# Altium PCB PCB1.PcbDoc
Units mil, origin at the board's own origin, x right, y up, seen from the top; angles counter-clockwise.
Board outline 3167.66 x 2735 mil, 2 copper layers (Top Layer, Bottom Layer); 57 components, 38 nets, 179 pads, 149 vias.
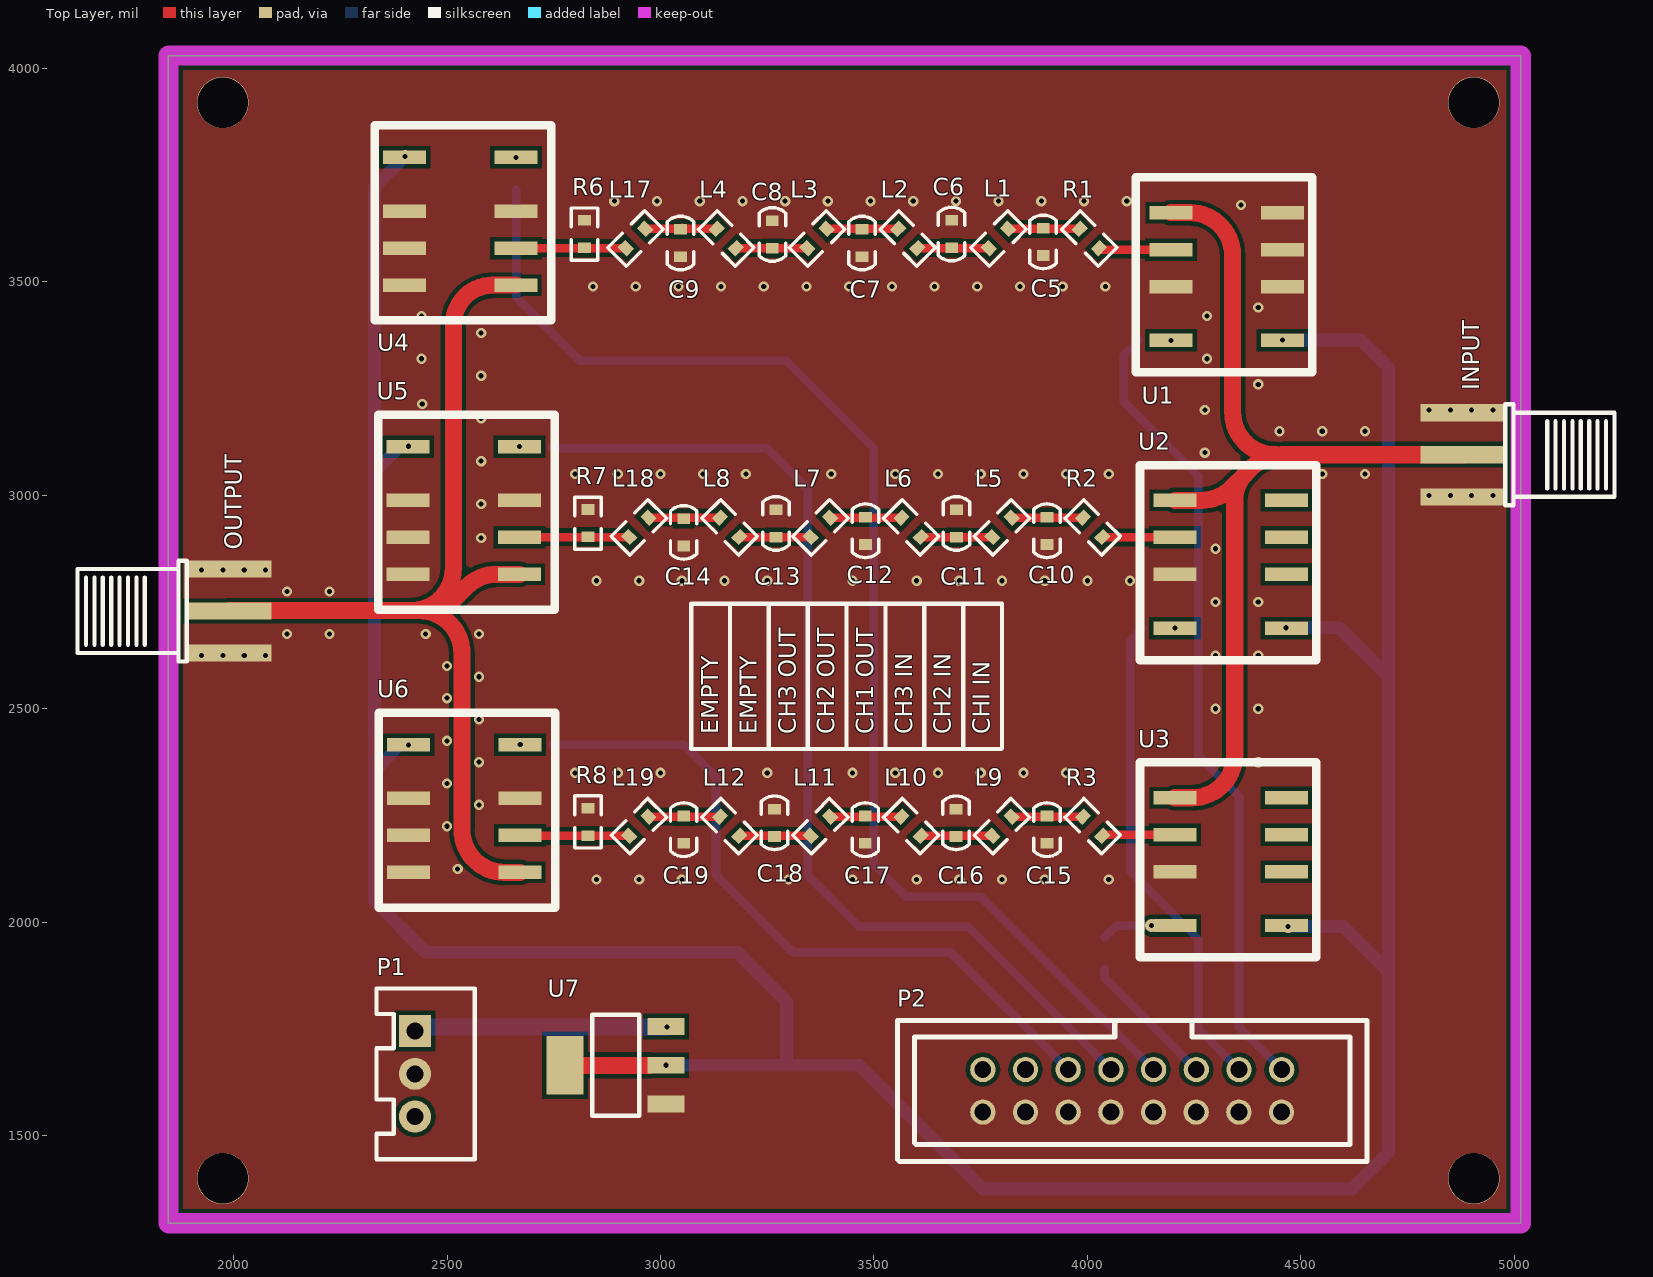
[diagram p0: Top Layer view]
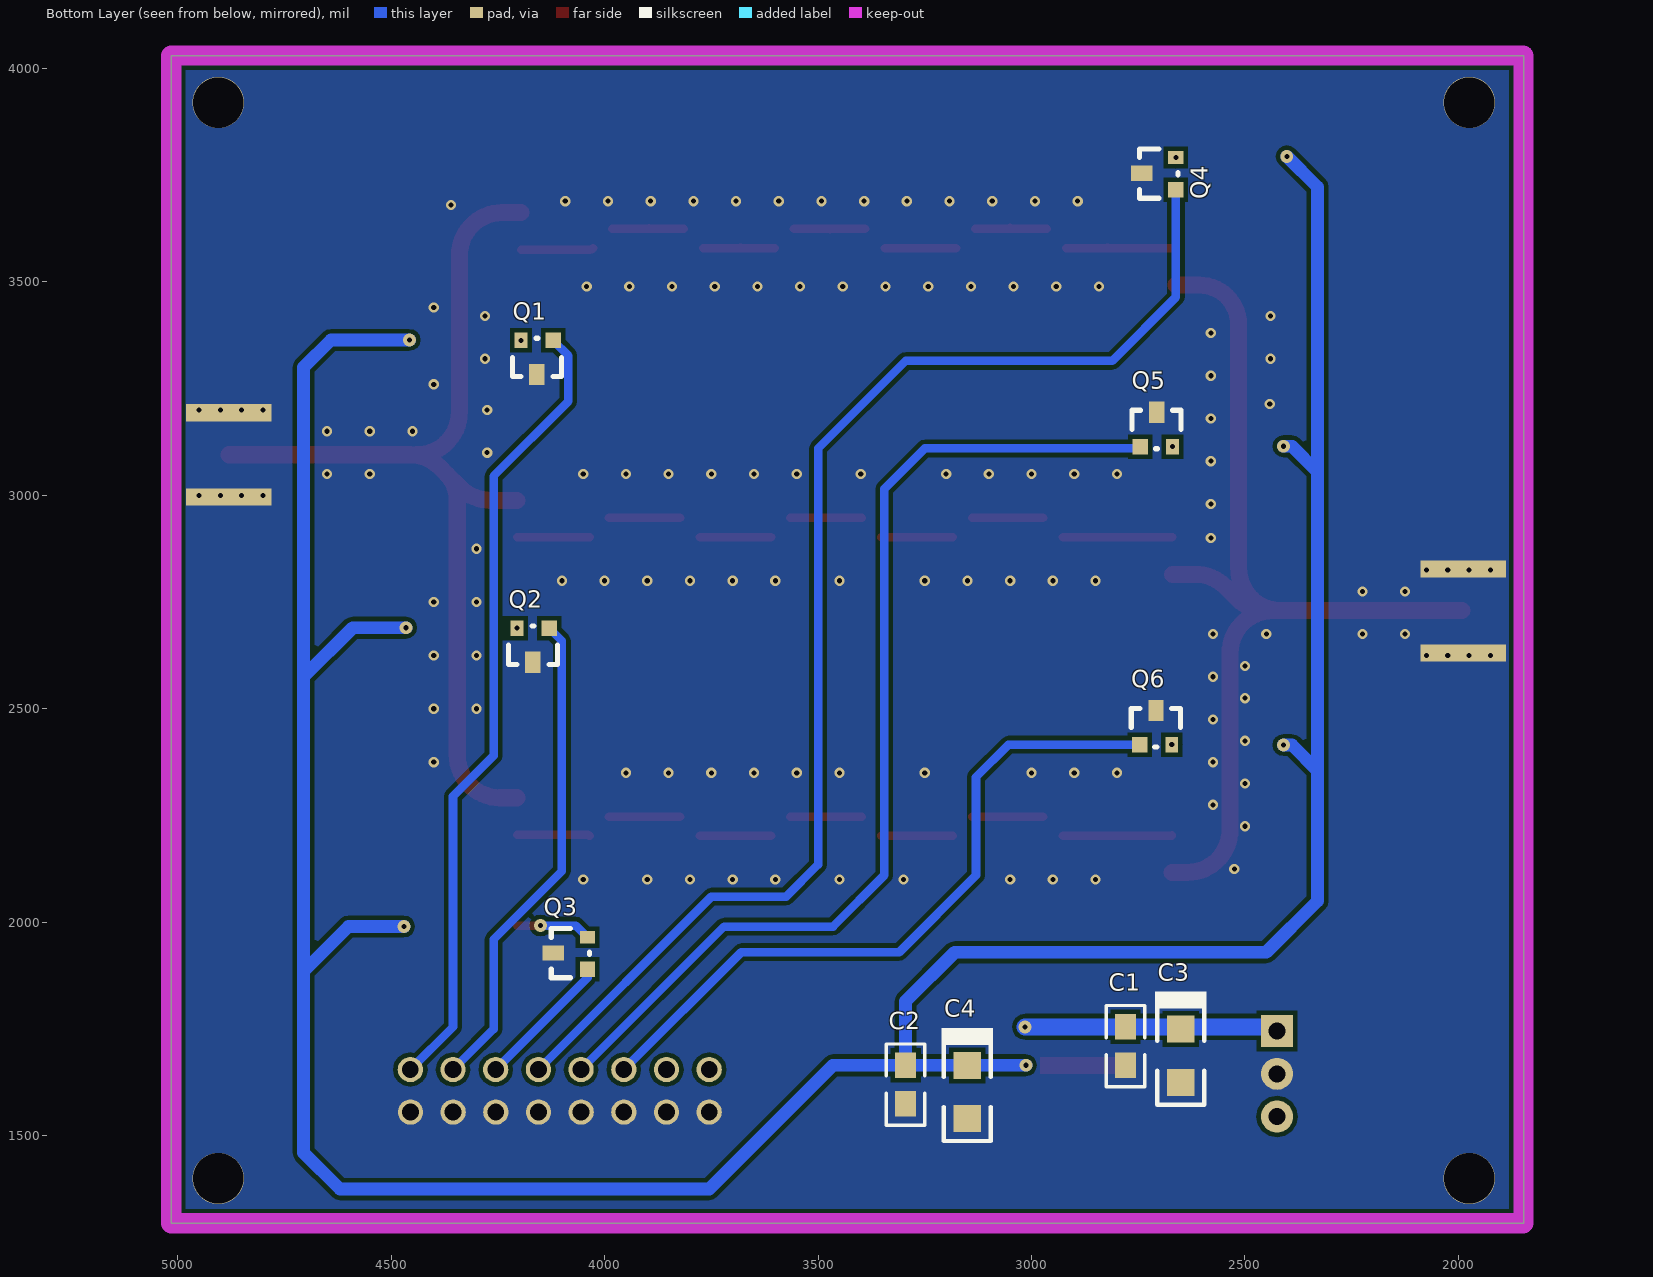
[diagram p1: Bottom Layer view, seen from below]

## Layer stack, top to bottom
Top Solder: solder mask 0.4, Solder Resist, Dk 3.5
Top Layer: signal copper 1.4
Dielectric 1: dielectric 12.6, FR-4, Dk 4.8
Bottom Layer: signal copper 1.4
Bottom Solder: solder mask 0.4, Solder Resist, Dk 3.5

## Board outline
1847.34,1295 1847.34,4030 5015,4030 5015,1295

## Design rules (kind name [scope] priority, off if disabled: settings)
Clearance [All] p1: gap=10
PlaneConnect [All] p1: planeconnectstyle=Direct reliefexpansion=20 reliefentries=4 reliefconductorwidth=10 reliefairgap=10
PolygonConnect [All] p1: connectstyle=Direct reliefconductorwidth=10 reliefentries=4 polygonreliefangle="90 Angle" airgapwidth=10
RoutingVias [All] p1: holewidth=28 width=50 viastyle="Through Hole" minholewidth=28 minwidth=50 maxholewidth=28 maxwidth=50
SolderMaskExpansion [All] p1: expansion=4
Width [All] p1: maxlimit=100 minlimit=10 preferedwidth=10
29 further rules are at their usual default settings.

## Components (designator, comment, footprint, x,y, rotation, side; value= is the part's Value field where it differs from the comment)
C1 "0.1uf" 0805 2780,1665 r90 bottom
C2 "0.1uf" 0805 3295,1575 r90 bottom
C3 "Cap" 3216C-TYPE_A 2650.5,1750 r90 bottom
C4 "Cap" 3216C-TYPE_A 3150.5,1665 r90 bottom
C5 "0.1uf" 0603C 3896.37,3561.63 r90 top
C6 "0.1uf" 0603C 3682,3644 r270 top
C7 "0.1uf" 0603C 3472,3559 r90 top
C8 "0.1uf" 0603C 3262,3643 r270 top
C9 "0.1uf" 0603C 3047,3559 r90 top
C10 "0.1uf" 0603C 3905,2885 r90 top
C11 "0.1uf" 0603C 3693.12,2966.16 r270 top
C12 "0.1uf" 0603C 3480,2885 r90 top
C13 "0.1uf" 0603C 3270.62,2966.16 r270 top
C14 "0.1uf" 0603C 3054.37,2881.16 r90 top
C15 "0.1uf" 0603C 3905,2185 r90 top
C16 "0.1uf" 0603C 3692.34,2265 r270 top
C17 "0.1uf" 0603C 3479.69,2185 r90 top
C18 "0.1uf" 0603C 3267.03,2265 r270 top
C19 "0.1uf" 0603C 3054.37,2185 r90 top
INPUT "差分输出" SMA-LYING 4939.06,3098.94 r180 top (schematic designator Vo_S1)
L1 "0" 0603R 3791.77,3601.63 r225 top
L2 "0" 0603R 3579.17,3601.63 r135 top
L3 "0" 0603R 3366.57,3601.63 r225 top
L4 "0" 0603R 3153.97,3601.63 r135 top
L5 "0" 0603R 3799.77,2925 r225 top
L6 "0" 0603R 3587.17,2925 r135 top
L7 "0" 0603R 3374.57,2925 r225 top
L8 "0" 0603R 3161.97,2925 r135 top
L9 "0" 0603R 3799.77,2225 r225 top
L10 "0" 0603R 3587.17,2225 r135 top
L11 "0" 0603R 3374.57,2225 r225 top
L12 "0" 0603R 3161.97,2225 r135 top
L17 "0" 0603R 2941.37,3601.63 r225 top
L18 "0" 0603R 2949.37,2925 r225 top
L19 "0" 0603R 2949.37,2225 r225 top
OUTPUT "差分输出" SMA-LYING 1930,2725 r0 top (schematic designator Vo_S2)
P1 "XH2.54-3p" XH2.54-3p 2425,1745 r270 top
P2 "DC-316P" DC3-14P 4654.61,1770.35 r180 top
Q1 "SI2301" SOT-23 4072.83,3242.74 r0 bottom
Q2 "SI2301" SOT-23 4082.24,2568.74 r0 bottom
Q3 "SI2301" SOT-23 4160.28,1842.24 r90 bottom
Q4 "SI2301" SOT-23 2782.28,3668.24 r90 bottom
Q5 "SI2301" SOT-23 2792.76,3234.49 r180 bottom
Q6 "SI2301" SOT-23 2794.17,2536.26 r180 bottom
R1 "49.9R" 0603R 4004.37,3601.63 r135 top
R2 "49.9R" 0603R 4012.37,2925 r135 top
R3 "49.9R" 0603R 4012.37,2225 r135 top
R6 "49.9R" 0603R 2822,3612 r270 top
R7 "49.9R" 0603R 2830,2935 r270 top
R8 "49.9R" 0603R 2830,2235 r270 top
U1 "FTR-B3G" FTR-B3G 4507.39,3347.27 r90 top
U2 "FTR-B3G" FTR-B3G 4516.81,2673.27 r90 top
U3 "FTR-B3G" FTR-B3G 4516.81,1976.65 r90 top
U4 "FTR-B3G" FTR-B3G 2350.19,3807.35 r270 top
U5 "FTR-B3G" FTR-B3G 2358.19,3129.96 r270 top
U6 "FTR-B3G" FTR-B3G 2359.61,2431.73 r270 top
U7 "AMS1117-3.3V" SOT-223 2895,1665 r0 top

## Footprints (in the part's own frame and the unit in brackets; to place one, negate y for a bottom-side part, rotate by r counter-clockwise, add the part's x,y. Pads: shape width x height; smd on the part's side, far side on the other; paste and mask are expansions set on the pad)
0603C [mil]
  rect 25x30 smd: 1(0,0) 2(64,0)
  silkscreen extent -31,-31 95,31
0603R [mil]
  rect 25x30 smd: 1(-32,0) 2(32,0)
  silkscreen extent -61,-31 61,31
0805 [mil]
  rect 60x50 smd: 1(0,0) 2(90,0)
  silkscreen extent -50,-45 140,45
3216C-TYPE_A [mm]
  rect 1.6x1.65 smd: 1(0,0) 2(-3.175,0)
  silkscreen extent -4.51,-1.54 2.22,1.52
DC3-14P [mm]
  round 1.5 hole 1: 1(5.07,2.93) 2(5.08,5.461) 3(7.61,2.93) 4(7.618,5.461) 5(10.15,2.93) 6(10.157,5.461) 7(12.69,2.93) 8(12.695,5.461) 9(15.23,2.93) 10(15.233,5.461) 11(17.77,2.93) 12(17.772,5.461) 13(20.31,2.93) 14(20.31,5.461) 15(22.85,2.93) 16(22.85,5.461)
  silkscreen extent 0,0 27.92,8.4
FTR-B3G [mm]
  rect 0.8x2.56 smd: 1(0.4,1.28) 2(3.6,1.28) 3(5.8,1.28) 4(8,1.28) 5(8,7.92) 6(5.8,7.92) 7(3.6,7.92) 8(0.4,7.92)
  silkscreen extent -1.5,-0.5 10.1,10
SMA-LYING [mm]
  rect 5.08x1.016 smd: 0(1.5,0.1) 1(1.5,2.6) 1(1.5,-2.4)
  rect 5.08x1.016 smd far side: 1(1.5,2.6) 1(1.5,-2.4)
  silkscreen extent -7.5,-2.9 -1,3.1
SOT-23 [mil]
  rect 36x36 smd: 1(47.76,-120.28)
  rect 30x36 smd: 2(122.76,-120.28)
  rect 36x50 smd: 3(85.76,-40.28)
  silkscreen extent 28,-125 143,-35
SOT-223 [mm]
  rect 2.2x1 smd: 1(3,-2.3) 2(3,0) 3(3,2.3)
  rect 2.2x3.5 smd: 2(-3,0)
  silkscreen extent -1.4,-3 1.4,3, body extent -3.49,-3.24 3.49,3.24, height 1.64
XH2.54-3p [mil]
  rect 75x75 hole 40: 1(0,0)
  round 75 hole 40: 2(100,0) 3(200,0)
  silkscreen extent -100,-90 300,140

## Part data
C1 C2 C5 C6 C7 C8 C9 C10 C11 C12 C13 C14 C15 C16 C17 C18 C19: library part Cap
C3 C4: library part "Tantalium Cap"
INPUT OUTPUT: library part SMA
L1 L2 L3 L4 L5 L6 L7 L8 L9 L10 L11 L12 L17 L18 L19 R1 R2 R3 R6 R7 R8: library part Res
P2: library part DC3-16P

## Via types
v1: diameter 24, hole 12, Top Layer to Bottom Layer, 131 vias
v2: diameter 30, hole 12, Top Layer to Bottom Layer, 14 vias
v3: diameter 120.08, hole 118.11, Top Layer to Bottom Layer, 4 vias

## Nets (pads, with @x,y where several pads share a name; then routed paths per layer and width w, separated by ;. In a path a pad name is that pad's centre, name@x,y a point inside that pad or via, vN(x,y) a via of type N, cw(c..) or ccw(c..) an arc to the next point about the centre after c; other vN are vias at no path point)
5V: C2.2 C4.1 U1.1 U2.1 U3.1 U4.1 U5.1 U6.1 U7.2 | length 7723.7
  Bottom Layer w30: v2(2402,3794) 2330,3722 2330,3055 ; v2(2410,2415) 2390,2415 2330,2355 ; v2(2410,3115) 2390,3115 2330,3055 ; v2(3013.11,1665) C4.1 C2.2 ; v2(4457,3364) 4641,3364 4705,3300 4705,2575 ; v2(4465,2690) 4590,2690 4705,2575 ; v2(4470,1990) 4600,1990 4705,1885 ; 2330,2355 2330,3055 ; 2330,2355 2330,2050 2450,1930 3180,1930 3295,1815 C2.2 ; C2.2 3465,1665 3755,1375 4620,1375 4705,1460 4705,1885 ; 4705,1885 4705,2575
CH1: P2.1 Q1.1 | length 1876
  Bottom Layer w20: Q1.1 4085,3327.43 4085,3220 4260,3045 4260,2390 4355,2295 4355,1755 P2.1
CH2: P2.3 Q2.1 | length 1152.1
  Bottom Layer w20: Q2.1 4100,2659.02 4100,2120 4260,1960 4260,1750 P2.3
CH3: P2.5 Q3.1 | length 324.1
  Bottom Layer w20: Q3.1 4040,1870 P2.5
CH4: P2.7 Q4.1 | length 3065.5
  Bottom Layer w20: Q4.1 2662,3464 2811,3315 3295,3315 3500,3110 3500,2135 3575,2060 3750,2060 P2.7
CH5: P2.9 Q5.1 | length 2444.6
  Bottom Layer w20: Q5.1 2749.21,3110 3250,3110 3345,3015 3345,2110 3465,1990 3720,1990 P2.9
CH6: P2.11 Q6.1 | length 1658.5
  Bottom Layer w20: Q6.1 3054.02,2415.98 3130,2340 3130,2110 3310,1930 3680,1930 P2.11
GND: C1.1 C2.1 C3.2 C4.2 C5.1 C6.1 C7.1 C8.1 C9.1 C10.1 C11.1 C12.1 C13.1 C14.1 C15.1 C16.1 C17.1 C18.1 C19.1 INPUT.1 OUTPUT.1 P1.2 P2.2 P2.4 P2.6 P2.8 P2.10 P2.12 P2.14 P2.16 Q1.3 Q2.3 Q3.3 Q4.3 Q5.3 Q6.3 R6.1 R7.1 R8.1 U1.2 U1.3 U1.4 U1.7 U2.7 U3.7 U4.2 U4.3 U4.4 U4.7 U5.2 U5.3 U5.4 U5.7 U6.2 U6.3 U6.4 U6.7 U7.1
  other v1: 2850,2100 2950,2100 3050,2100 3300,2100 3450,2100 3600,2100 3700,2100 3800,2100 3900,2100 4050,2100 2525,2125 2500,2225 2575,2275 2500,2325 2800,2350 2900,2350 3000,2350 3250,2350 3450,2350 3550,2350 3650,2350 3750,2350 3850,2350 3950,2350 2575,2375 4400,2375 2500,2425 2575,2475 4300,2500 4400,2500 2500,2525 2575,2575 2500,2600 1925,2625 1975,2625 2025,2625 2075,2625 4300,2625 4400,2625 2125,2675 2225,2675 2450,2675 2575,2675 4300,2750 4400,2750 2125,2775 2225,2775 2850,2800 2950,2800 3050,2800 3150,2800 3250,2800 3450,2800 3600,2800 3700,2800 3800,2800 3900,2800 4000,2800 4100,2800 1925,2825 1975,2825 2025,2825 2075,2825 4300,2875 2580,2900 2580,2980 4800,3000 4850,3000 4900,3000 4950,3000 2800,3050 2900,3050 3000,3050 3100,3050 3200,3050 3400,3050 3550,3050 3650,3050 3750,3050 3850,3050 3950,3050 4050,3050 4550,3050 4650,3050 2580,3080 4275,3100 4450,3150 4550,3150 4650,3150 2580,3180 4275,3200 4800,3200 4850,3200 4900,3200 4950,3200 2442,3214 4400,3260 2580,3280 2440,3320 4280,3320 2580,3380 2440,3420 4280,3420 4400,3440 2842,3489 2942,3489 3042,3489 3142,3489 3242,3489 3342,3489 3442,3489 3542,3489 3642,3489 3742,3489 3842,3489 3942,3489 4042,3489 4360,3680 2892,3689 2992,3689 3092,3689 3192,3689 3292,3689 3392,3689 3492,3689 3592,3689 3692,3689 3792,3689 3892,3689 3992,3689 4092,3689
  other v3: 1975,1400 4905,1400 1975,3920 4905,3920
LPF1: R1.1 U1.6 | length 169.5
  Top Layer w20: R1.1 ccw(c4035.17,3587.17) 4035.17,3575.61 U1.6
LPF2: R2.1 U2.6 | length 170.2
  Top Layer w20: R2.1 ccw(c4036.83,2904.2) 4036.83,2901.61 U2.6
LPF3: R3.1 U3.6 | length 170.7
  Top Layer w20: R3.1 cw(c4041.34,2196.03) 4041.34,2205 U3.6
NetC1_2: C1.2 C3.1 P1.1 U7.3 | length 595.7
  Bottom Layer w30: P1.1 cw(c2435,1745) P1.1@2435,1755
  Bottom Layer w40: P1.1@2435,1755 C1.2 v2(3015,1755)
NetC5_2: C5.2 L1.1 R1.2 | length 168.1
  Top Layer w20: L1.1 3893.06,3624.25 ccw(c3893.06,3628.94) C5.2 ccw(c3899.69,3628.94) 3899.69,3624.25 R1.2
NetC6_2: C6.2 L1.2 L2.1 | length 167.9
  Top Layer w20: L2.1 3679.59,3579 ccw(c3679.59,3582.41) C6.2 ccw(c3684.41,3582.41) 3684.41,3579 L1.2
NetC7_2: C7.2 L2.2 L3.1 | length 168
  Top Layer w20: L3.1 3468.97,3624.25 cw(c3468.97,3619.97) C7.2 cw(c3475.03,3619.97) 3475.03,3624.25 L2.2
NetC8_2: C8.2 L3.2 L4.1 | length 167.3
  Top Layer w20: L4.1 C8.2 L3.2
NetC9_2: C9.2 L4.2 L17.1 | length 168.6
  Top Layer w20: L17.1 3045.64,3624.25 ccw(c3045.64,3632.36) 3051.37,3626.63 ccw(c3057.1,3632.36) 3057.1,3624.25 L4.2
NetC10_2: C10.2 L5.1 R2.2 | length 167.3
  Top Layer w20: L5.1 R2.2
NetC11_2: C11.2 L5.2 L6.1 | length 167.3
  Top Layer w20: L6.1 L5.2
NetC12_2: C12.2 L6.2 L7.1 | length 167.3
  Top Layer w20: L7.1 L6.2
NetC13_2: C13.2 L7.2 L8.1 | length 167.3
  Top Layer w20: L8.1 L7.2
NetC14_2: C14.2 L8.2 L18.1 | length 167.3
  Top Layer w20: L18.1 L8.2
NetC15_2: C15.2 L9.1 R3.2 | length 167.3
  Top Layer w20: L9.1 R3.2
NetC16_2: C16.2 L9.2 L10.1 | length 167.3
  Top Layer w20: L10.1 L9.2
NetC17_2: C17.2 L10.2 L11.1 | length 167.3
  Top Layer w20: L11.1 L10.2
NetC18_2: C18.2 L11.2 L12.1 | length 167.3
  Top Layer w20: L12.1 L11.2
NetC19_2: C19.2 L12.2 L19.1 | length 167.3
  Top Layer w20: L19.1 L12.2
OUT1: L17.2 R6.2 U4.6 | length 257.3
  Top Layer w20: U4.6 2819.59,3579 ccw(c2819.59,3582.41) R6.2 ccw(c2824.41,3582.41) 2824.41,3579 L17.2
OUT2: L18.2 R7.2 U5.6 | length 256.9
  Top Layer w20: U5.6 cw(c2671.83,2899.78) 2671.83,2902.37 L18.2
OUT3: L19.2 R8.2 U6.6 | length 255.6
  Top Layer w20: U6.6 ccw(c2673.86,2205.83) 2673.86,2202.37 L19.2
OUTPUT: OUTPUT.0 U4.5 U5.5 U6.5 | length 2378.6
  Top Layer w20: OUTPUT.0 cw(c1991.62,2726.37) OUTPUT.0@1991.62,2730
  Top Layer w40: OUTPUT.0@1991.62,2730 2415,2730 ccw(c2415,2830) 2515,2830 2515,3400.39 cw(c2607,3400.39) 2607,3492.39 U4.5 ; U5.5 2616.42,2815 ccw(c2616.42,2715) 2545.71,2785.71 2519.29,2759.29 cw(c2448.58,2830) 2448.58,2730 2435,2730 cw(c2435,2630) 2535,2630 2535,2216.77 ccw(c2635,2216.77) 2635,2116.77 U6.5
"SIGNAL IN": INPUT.0 U1.5 U2.5 U3.5 | length 2314.9
  Top Layer w20: 4369.96,3049.96 cw(c4430.36,2989.64) 4370,3050 ; 4440,3095 4456.42,3095
  Top Layer w40: U1.5 4240,3662.23 cw(c4240,3562.23) 4340,3562.23 4340,3195 ccw(c4440,3195) 4440,3095 ; U3.5 4245,2291.61 ccw(c4245,2391.61) 4345,2391.61 4345,2989.64 cw(c4430.36,2989.64) 4369.96,3049.96 4337.52,3017.52 cw(c4266.81,3088.23) 4266.81,2988.23 U2.5 ; 4370,3050 4385.71,3065.71 cw(c4456.42,2995) 4456.42,3095 INPUT.0
U1: Q1.2 U1.8
  other v2: 4195.58,3363.02
U2: Q2.2 U2.8
  other v2: 4205,2689.02
U3: Q3.2 U3.8 | length 176.4
  Top Layer w20: v2(4150,1992.4) U3.8
  Bottom Layer w20: Q3.2 4067.4,1992.4 v2(4150,1992.4)
U4: Q4.2 U4.8
  other v2: 2662,3791
U5: Q5.2 U5.8
  other v2: 2670,3114.21
U6: Q6.2 U6.8
  other v2: 2671.42,2415.98
pads on no net: P1.3 P2.13 P2.15 U2.2 U2.3 U2.4 U3.2 U3.3 U3.4

## Polygon pours and split planes (outlines as drawn)
GND on Bottom Layer "Top Layer-No Net" (solid, pour order 8): 1847.34,1295 5015,1295 5015,4030 1847.34,4030
GND on Top Layer "Top Layer-No Net" (solid, pour order 10): 1847.34,4020 1847.34,1295 5015,1295 5015,4020

## Keep-outs
Keep-Out Layer:
  the board outline again, w47.24

## Other copper
Top Layer:
  rectangle net 5V: 2785,1645 2980,1685

## Silkscreen, mask and mechanical layers (free items; w line width, h text height)
Top Overlay:
  lines w10: 3071.86,2406 3071.86,2746 ; 3075.86,2746 3799.86,2746 3799.86,2408 ; 3076.86,2406 3797.86,2406 ; 3162.86,2406 3162.86,2744 ; 3253.86,2407 3253.86,2743 ; 3344.86,2406 3344.86,2744 ; 3435.86,2407 3435.86,2746 ; 3526.86,2409 3526.86,2746 ; 3617.86,2410 3617.86,2746 ; 3708.86,2408 3708.86,2746
  text "EMPTY" at 3134.86,2440 h40 r90
  text "EMPTY" at 3225.71,2440 h40 r90
  text "CH3 OUT" at 3316.57,2440 h40 r90
  text "CH2 OUT" at 3407.43,2440 h40 r90
  text "CH1 OUT" at 3498.29,2440 h40 r90
  text "CH3 IN" at 3589.14,2440 h40 r90
  text "CH2 IN" at 3680,2440 h40 r90
  text "CHI IN" at 3770.86,2440 h40 r90